# Altium PCB PDMC-P00-V00.PcbDoc
Units mil, origin at the board's own origin, x right, y up, seen from the top; angles counter-clockwise.
Board outline 1811.02 x 1102.36 mil, 2 copper layers (Top Layer, Bottom Layer), stack 61.8 mil thick; 77 components, 67 nets, 276 pads, 98 vias.
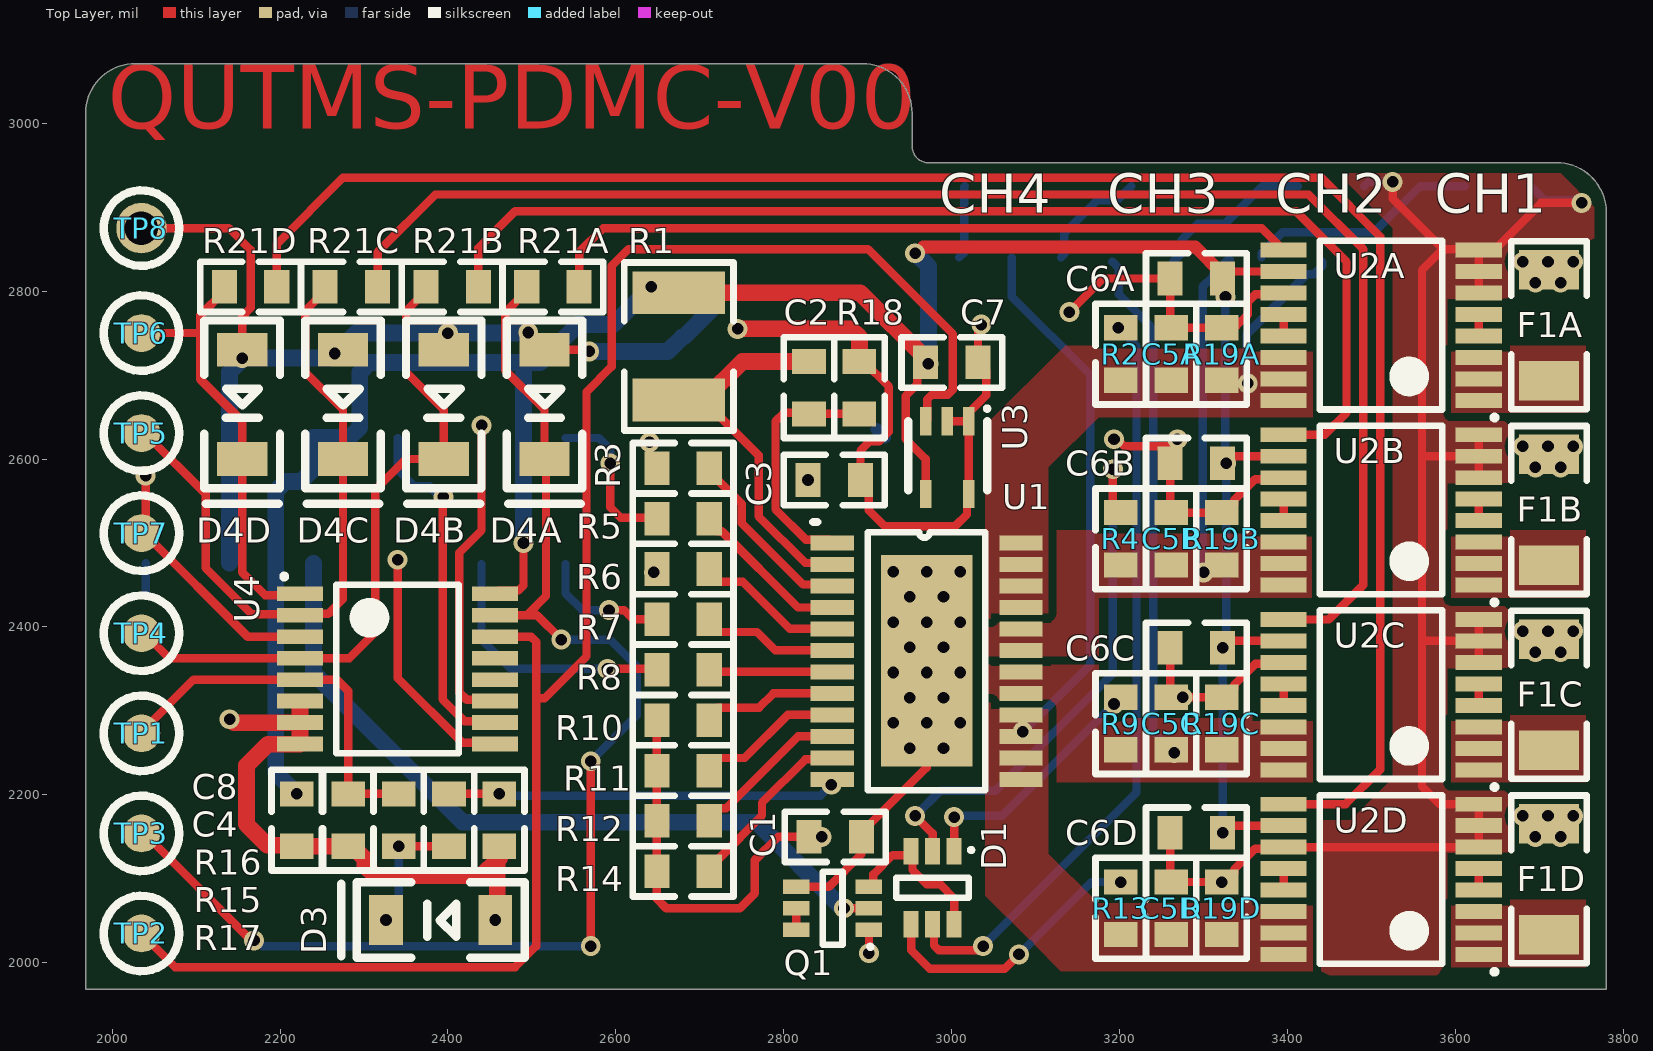
[diagram p0: Top Layer view]
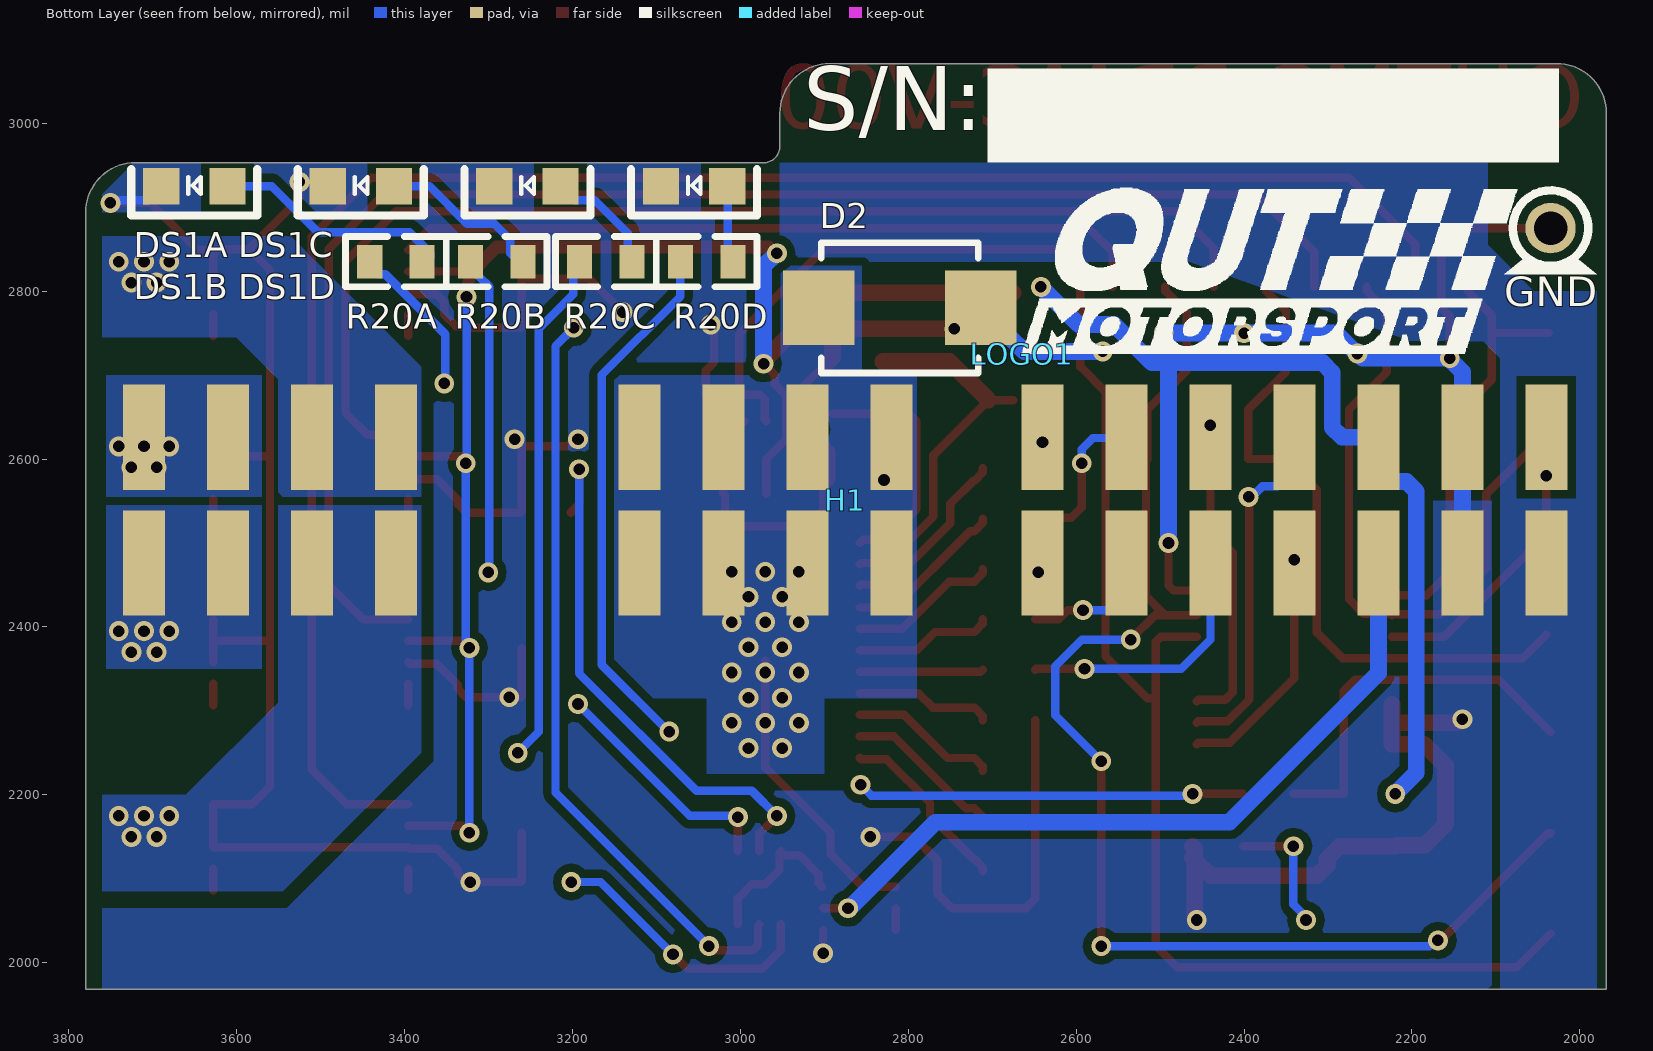
[diagram p1: Bottom Layer view, seen from below]

## Layer stack, top to bottom
Top Solder: solder mask 0.4, Solder Resist, Dk 3.5
Top Layer: signal copper 1.4
Dielectric 1: core 59, Core-043, Dk 4.3
Bottom Layer: signal copper 1.4
Bottom Solder: solder mask 0.4, Solder Resist, Dk 3.5

## Board outline
1968.5,1968.5 1968.5,3011.81 cw(c2027.56,3011.81) 2027.56,3070.87 2893.7,3070.87 cw(c2893.7,3011.81) 2952.76,3011.81 2952.76,2972.44 ccw(c2972.44,2972.44) 2972.44,2952.76 3720.47,2952.76 cw(c3720.47,2893.7) 3779.53,2893.7 3779.53,1968.5

## Design rules (kind name [scope] priority, off if disabled: settings)
Clearance [All] p1: gap=10 ignorepadtopadclearanceinfootprint=FALSE except(0: Arc-Hole Track-Hole SMDPad-Hole THPad-Hole Via-Hole Fill-Hole Poly-Hole Region-Hole Text-Hole; 6: SMDPad-SMDPad)
PolygonConnect [All] p1: connectstyle=Direct reliefconductorwidth=10 reliefentries=4 polygonreliefangle="90 Angle" airgapwidth=10
RoutingVias [All] p1: holewidth=13.78 width=23.62 viastyle="Through Hole" minholewidth=13.78 minwidth=23.62 maxholewidth=13.78 maxwidth=23.62
SilkToSilkClearance [All] p1: silktosilkclearance=0
SilkToSolderMaskClearance [IsPad] p1: minsilkscreentomaskgap=5 clearancetoexposedcopper=TRUE
SolderMaskExpansion [All] p1: expansion=4.02 istentingtop=FALSE
UnRoutedNet [All] p1: checkbadconnections=TRUE
Width [All] p1: maxlimit=60 minlimit=10 preferedwidth=20 minimp=50.000000 maximp=50.000000 favimp=50.000000
27 further rules are at their usual default settings.

## Classes and differential pairs
channel class PDMC-S03-V00-ChannelOutput: PDMC-S03-V00-ChannelOutput1 PDMC-S03-V00-ChannelOutput2 PDMC-S03-V00-ChannelOutput3 PDMC-S03-V00-ChannelOutput4
net class "CURRENT SENSE[1..4]": "CURRENT SENSE1" "CURRENT SENSE2" "CURRENT SENSE3" "CURRENT SENSE4"
component class PDMC-S06-V00-Connector: H1
component class PDMC-S05-V00-Multiplexer: C8 TP1 TP2 TP3 TP4 TP5 TP6 TP7 TP8 U4
component class PDMC-S04-V00-TempSensor: C7 U3
component class PDMC-S03-V00-ChannelOutput4: C5D C6D D4D DS1D F1D R19D R20D R21D U2D
component class PDMC-S03-V00-ChannelOutput3: C5C C6C D4C DS1C F1C R19C R20C R21C U2C
component class PDMC-S03-V00-ChannelOutput2: C5B C6B D4B DS1B F1B R19B R20B R21B U2B
component class PDMC-S03-V00-ChannelOutput1: C5A C6A D4A DS1A F1A R19A R20A R21A U2A
component class PDMC-S02-V00-SPOC: C1 C2 C3 C4 D1 D2 D3 Q1 R1 R2 R3 R4 R5 R6 R7 R8 R9 R10 R11 R12 R13 R14 R15 R16 R17 R18 U1
component class PDMC-S01-V00-PowerDistributionModuleCard: LOGO1
net class "SPOC CH[1..4]": "SPOC CH1" "SPOC CH2" "SPOC CH3" "SPOC CH4"
net class "OUT CH[1..4]": "OUT CH1" "OUT CH2" "OUT CH3" "OUT CH4"

## Components (designator, comment, footprint, x,y, rotation, side; value= is the part's Value field where it differs from the comment)
C1 "100nF" Cap_Ceramic_0603 2861.24,2150 r0 top
C2 "470nF" Cap_Ceramic_0603 2830,2685 r90 top
C3 "100nF" Cap_Ceramic_0603 2860,2575 r180 top
C4 "1nF" Cap_Ceramic_0603 2281.24,2170 r90 top
C5A "10nF" Cap_Ceramic_0603 3261.24,2725 r270 top (schematic designator C5)
C5B "10nF" Cap_Ceramic_0603 3261.24,2505 r270 top (schematic designator C5)
C5C "10nF" Cap_Ceramic_0603 3261.24,2285 r270 top (schematic designator C5)
C5D "10nF" Cap_Ceramic_0603 3261.24,2065 r270 top (schematic designator C5)
C6A "100nF" Cap_Ceramic_0603 3291.24,2815 r0 top (schematic designator C6)
C6B "100nF" Cap_Ceramic_0603 3291.24,2595 r0 top (schematic designator C6)
C6C "100nF" Cap_Ceramic_0603 3291.24,2375 r0 top (schematic designator C6)
C6D "100nF" Cap_Ceramic_0603 3291.24,2155 r0 top (schematic designator C6)
C7 "100nF" Cap_Ceramic_0603 3000,2715 r180 top
C8 "100nF" Cap_Ceramic_0603 2220,2170 r90 top
D1 "BAW56S" TSSOP6 2977.1,2089.39 r270 top
D2 "SMBJ15CA" DO-214AA 2810,2780 r0 bottom
D3 "BZT52B3V3" SOD123 2391.24,2051 r180 top
D4A "BZT52B3V3" SOD123 2515,2665 r270 top (schematic designator D4)
D4B "BZT52B3V3" SOD123 2395,2665 r270 top (schematic designator D4)
D4C "BZT52B3V3" SOD123 2275,2665 r270 top (schematic designator D4)
D4D "BZT52B3V3" SOD123 2155,2665 r270 top (schematic designator D4)
DS1A "LTST-S270TBKT" LTST-S270TBKT 3650,2925 r180 bottom (schematic designator DS1)
DS1B "LTST-S270TBKT" LTST-S270TBKT 3451.67,2925 r180 bottom (schematic designator DS1)
DS1C "LTST-S270TBKT" LTST-S270TBKT 3253.33,2925 r180 bottom (schematic designator DS1)
DS1D "LTST-S270TBKT" LTST-S270TBKT 3055,2925 r180 bottom (schematic designator DS1)
F1A "C1F 8A" FUSE_1206 3711.24,2759.37 r90 top (schematic designator F1)
F1B "C1F 8A" FUSE_1206 3711.24,2539.37 r90 top (schematic designator F1)
F1C "C1F 8A" FUSE_1206 3711.24,2319.37 r90 top (schematic designator F1)
F1D "C1F 8A" FUSE_1206 3711.24,2099.37 r90 top (schematic designator F1)
H1 "TSM-104, TSM-107" "TSM-104, TSM-107" 3710,2625.98 r180 bottom locked
LOGO1 "15mm Wide QUTMS Logo" "QUTMS LOGO 15MM" 2665,2725 r180 bottom
Q1 "PUMD3" TSSOP6 2858.05,2065 r180 top
R1 "470R" Res_ThinFilm_1210 2675,2733.99 r90 top
R2 "1k5" Res_ThinFilm_0603 3201.24,2725 r90 top
R3 "1k2" Res_ThinFilm_0603 2680,2588.99 r0 top
R4 "1k5" Res_ThinFilm_0603 3201.24,2505 r90 top
R5 "1k2" Res_ThinFilm_0603 2680,2528.99 r0 top
R6 "1k2" Res_ThinFilm_0603 2680,2468.99 r0 top
R7 "1k2" Res_ThinFilm_0603 2680,2408.99 r0 top
R8 "4k7" Res_ThinFilm_0603 2680,2348.99 r0 top
R9 "1k5" Res_ThinFilm_0603 3201.24,2285 r90 top
R10 "10k" Res_ThinFilm_0603 2680,2288.99 r0 top
R11 "10k" Res_ThinFilm_0603 2680,2228.99 r0 top
R12 "10k" Res_ThinFilm_0603 2680,2168.99 r0 top
R13 "1k5" Res_ThinFilm_0603 3201.24,2065 r90 top
R14 "10k" Res_ThinFilm_0603 2680,2108.99 r0 top
R15 "4k7" Res_ThinFilm_0603 2401.24,2170 r90 top
R16 "1k" Res_ThinFilm_0603 2341.24,2170 r270 top
R17 "1k2" Res_ThinFilm_0603 2461.24,2170 r90 top
R18 "47R" Res_ThinFilm_0603 2890,2685 r270 top
R19A "47k" Res_ThinFilm_0603 3321.24,2725 r270 top (schematic designator R19)
R19B "47k" Res_ThinFilm_0603 3321.24,2505 r270 top (schematic designator R19)
R19C "47k" Res_ThinFilm_0603 3321.24,2285 r270 top (schematic designator R19)
R19D "47k" Res_ThinFilm_0603 3321.24,2065 r270 top (schematic designator R19)
R20A "2k2" Res_ThinFilm_0603 3410,2835 r0 bottom (schematic designator R20)
R20B "2k2" Res_ThinFilm_0603 3290,2835 r0 bottom (schematic designator R20)
R20C "2k2" Res_ThinFilm_0603 3160,2835 r0 bottom (schematic designator R20)
R20D "2k2" Res_ThinFilm_0603 3040,2835 r0 bottom (schematic designator R20)
R21A "10k" Res_ThinFilm_0603 2525,2805 r0 top (schematic designator R21)
R21B "10k" Res_ThinFilm_0603 2405,2805 r0 top (schematic designator R21)
R21C "10k" Res_ThinFilm_0603 2285,2805 r0 top (schematic designator R21)
R21D "10k" Res_ThinFilm_0603 2165,2805 r0 top (schematic designator R21)
TP1 "TestPoint_SMD" TestPointSMD 2035,2273.33 r90 top
TP2 "TestPoint_SMD" TestPointSMD 2035,2035 r90 top
TP3 "TestPoint_SMD" TestPointSMD 2035,2154.17 r90 top
TP4 "TestPoint_SMD" TestPointSMD 2035,2392.5 r90 top
TP5 "TestPoint_SMD" TestPointSMD 2035,2630.83 r90 top
TP6 "TestPoint_SMD" TestPointSMD 2035,2750 r90 top
TP7 "TestPoint_SMD" TestPointSMD 2035,2511.67 r90 top
TP8 "TestPoint_Hoop_White" TestPointHoop_WHITE 2035,2875 r90 top
U1 "BTS71220-4ESA" PG-TSDO-24-32 2970,2360 r0 top locked
U2A "INA250" TSSOP-16N 3511.24,2759.37 r180 top (schematic designator U2)
U2B "INA250" TSSOP-16N 3511.24,2539.37 r180 top (schematic designator U2)
U2C "INA250" TSSOP-16N 3511.24,2319.37 r180 top (schematic designator U2)
U2D "INA250" TSSOP-16N 3511.24,2099.37 r180 top (schematic designator U2)
U3 "TMP235" SC70 3000,2600 r270 top
U4 "CD74HC4051PWR" TSSOP-16N 2340,2350 r0 top

## Footprints (in the part's own frame and the unit in brackets; to place one, negate y for a bottom-side part, rotate by r counter-clockwise, add the part's x,y. Pads: shape width x height; smd on the part's side, far side on the other; paste and mask are expansions set on the pad)
Cap_Ceramic_0603 [mil]
  rect 30x40 smd: 1(-31.24,0) 2(31.24,0)
  silkscreen extent -60,-30 60,30, body extent -31,-16 31,16, height 33
DO-214AA [mm]
  rect 2.16x2.26 smd paste+0 mask+0: 1(-2.45,0) 2(2.45,0)
  silkscreen extent -2.37,-1.97 2.37,1.97, body extent -2.7,-1.81 2.7,1.81, height 2.61
FUSE_1206 [mil]
  rect 47x71 smd: 1(-66.08,0) 2(66.08,0)
  silkscreen extent -100,-45 100,45, body extent -63,-31 63,31, height 24
LTST-S270TBKT [mm]
  rect 1.1x1.1 smd: A(1,0) K(-1,0)
  silkscreen extent -1.91,-0.89 1.91,0.51, body extent -1.07,-0.25 1.08,0.75, height 0.6
PG-TSDO-24-32 [mm]
  rect 1.31x0.45 smd: 1(-2.855,3.556) 2(-2.855,2.906) 3(-2.855,2.256) 4(-2.855,1.606) 5(-2.855,0.956) 6(-2.855,0.306) 7(-2.855,-0.344) 8(-2.855,-0.994) 9(-2.855,-1.644) 10(-2.855,-2.294) 11(-2.855,-2.944) 12(-2.855,-3.594) 13(2.855,-3.594) 14(2.855,-2.944) 15(2.855,-2.294) 16(2.855,-1.644) 17(2.855,-0.994) 18(2.855,-0.344) 19(2.855,0.306) 20(2.855,0.956) 21(2.855,1.606) 22(2.855,2.256) 23(2.855,2.906) 24(2.855,3.556)
  rect 2.77x6.4 smd: EP(0,0)
  silkscreen extent -3.43,-3.92 1.78,4.19, body extent -3,-4.32 3,4.33, height 1.01
"QUTMS LOGO 15MM" [mil]
  silkscreen extent 0,0 590,198
Res_ThinFilm_0603 [mil]
  rect 30x40 smd: 1(-31.24,0) 2(31.24,0)
  silkscreen extent -60,-30 60,30, body extent -31,-16 32,16, height 18
Res_ThinFilm_1210 [mm]
  rect 1.3x2.8 smd: 1(-1.625,0) 2(1.625,0)
  silkscreen extent -2.54,-1.65 2.54,1.65, body extent -1.6,-1.25 1.6,1.25, height 0.6
SC70 [mm] "SC70, 5-leads"
  rect 0.85x0.35 smd: 1(-1.143,0.508) 2(-1.143,-0.142) 3(-1.143,-0.792) 4(1.057,-0.792) 5(1.057,0.508)
  silkscreen extent -1.59,-1.32 0.94,1.13, body extent -1.14,-1.13 0.96,0.87, height 0.9
SOD123 [mil]
  rect 40x60 smd: A(-65,0) K(65,0)
  silkscreen extent -100,-45 118,45, body extent -74,-33 74,33, height 47
TestPointHoop_WHITE [mil]
  round 60 hole 40: 1(0,0)
  silkscreen extent -45,-45 45,45, body extent -39,-63 39,63, height 319
TestPointSMD [mil]
  round 45 smd: 1(0,0)
  silkscreen extent -45,-45 45,45
"TSM-104, TSM-107" [mm]
  rect 1.27x3.18 smd: A1(0,0) A2(2.54,0) A3(5.08,0) A4(7.62,0) B1(0,-3.81) B2(2.54,-3.81) B3(5.08,-3.81) B4(7.62,-3.81) C1(14.986,0) C2(17.526,0) C3(20.066,0) C4(22.606,0) D1(14.986,-3.81) D2(17.526,-3.81) D3(20.066,-3.81) D4(22.606,-3.81) E1(27.178,0) E2(29.718,0) E3(32.258,0) E4(34.798,0) E5(37.338,0) E6(39.878,0) E7(42.418,0) F1(27.178,-3.81) F2(29.718,-3.81) F3(32.258,-3.81) F4(34.798,-3.81) F5(37.338,-3.81) F6(39.878,-3.81) F7(42.418,-3.81)
  body extent -1.27,-15.11 43.69,1.14, height 6.07
TSSOP6 [mm] "TSOP, 6-Leads, Body 2.00x1.25mm, Pitch 0.65mm, IPC Medium Density"
  rect 0.8x0.45 smd: 1(-1.1,0.65) 2(-1.1,0) 3(-1.1,-0.65) 4(1.1,-0.65) 5(1.1,0) 6(1.1,0.65)
  silkscreen extent -1.2,-1.1 0.3,1.23, body extent -1.05,-1.05 1.05,1.1, height 0.93
TSSOP-16N [mm] "TSOP, 16-Leads, Body 5.00x4.40mm, Pitch 0.65mm, IPC Medium Density"
  rect 1.4x0.45 smd: 1(-2.95,2.275) 2(-2.95,1.625) 3(-2.95,0.975) 4(-2.95,0.325) 5(-2.95,-0.325) 6(-2.95,-0.975) 7(-2.95,-1.625) 8(-2.95,-2.275) 9(2.95,-2.275) 10(2.95,-1.625) 11(2.95,-0.975) 12(2.95,-0.325) 13(2.95,0.325) 14(2.95,0.975) 15(2.95,1.625) 16(2.95,2.275)
  silkscreen extent -3.5,-2.55 1.85,2.87, body extent -3.2,-2.55 3.2,2.55, height 1.2

## Part data
C1 C3 C6A C6B C6C C6D C7 C8: library part "100nF 50V 5% X7R 0603", "Capacitor, Ceramic, SMD, 100nF, 50V, 5%, X7R, 0603"
C2: library part "470nF 50V 5% X7R 0603", "Capacitor, Ceramic, SMD, 470nF, 50V, 5%, X7R, 0603"
C4: library part "1nF 50V 5% X7R 0603", "Capacitor, Ceramic, SMD, 1nF, 25V, 5%, X7R, 0603"
C5A C5B C5C C5D: library part "10nF 25V 5% X7R 0603", "Capacitor, Ceramic, SMD, 10nF, 25V, 5%, X7R, 0603"
D1: "Diode Array 2 Pair Common Anode Standard 90V 250mA (DC) Surface Mount 6-TSSOP, SC-88, SOT-363", ComponentLink1Description=Digikey, ComponentLink1URL=https://www.digikey.com.au/product-detail/en/nexperia-usa-inc/BAW56S-115/1727-4833-1-ND/2531320, ComponentLink2Description=Datasheet, ComponentLink2URL=https://assets.nexperia.com/documents/data-sheet/BAV756S_BAW56_SER.pdf
D2: "Diode, SMD, TVS, 15V, 24.4V, 24.6A Ipp, DO-214AA", ComponentLink1Description=Datasheet, ComponentLink1URL=https://www.littelfuse.com/~/media/electronics/datasheets/tvs_diodes/littelfuse_tvs_diode_smbj_datasheet.pdf.pdf, ComponentLink2Description=Digikey, ComponentLink2URL=https://www.digikey.com.au/product-detail/en/littelfuse-inc/SMBJ15CA/SMBJ15CALFCT-ND/285983
D3 D4A D4B D4C D4D: "Diode, SMD, Zener, 3.3V, 2%, 410mW, SOD-123", ComponentLink1Description=Datasheet, ComponentLink1URL=https://www.vishay.com/docs/85760/bzt52.pdf, ComponentLink2Description=Digikey, ComponentLink2URL=https://www.digikey.com/product-detail/en/vishay-semiconductor-diodes-division/BZT52B3V3-E3-08/112-BZT52B3V3-E3-08CT-ND/8564806
DS1A DS1B DS1C DS1D: "Blue 465~475nm 0603 Light Emitting Diodes (LED) RoHS"
F1A F1B F1C F1D: library part "C1F 8", "8A 125V AC 63V DC Fuse Board Mount (Cartridge Style Excluded) Surface Mount 1206 (3216 Metric)", ComponentLink1Description=Datasheet, ComponentLink1URL=https://belfuse.com/resources/datasheets/circuitprotection/ds-cp-c1f-series.pdf, ComponentLink2Description=Digikey, ComponentLink2URL=https://www.digikey.com.au/product-detail/en/bel-fuse-inc/C1F-8/507-1889-1-ND/4968171
H1: "CONN HEADER SMD R/A 8POS and 14POS 2.54MM", ComponentLink1Description=Digikey, ComponentLink1URL=https://www.digikey.com.au/product-detail/en/samtec-inc/TSM-104-01-L-DH/SAM10277-ND/6679014, ComponentLink2Description=Digikey, ComponentLink2URL=https://www.digikey.com.au/product-detail/en/samtec-inc/TSM-107-01-L-DH/SAM15902-ND/7638593, ComponentLink3Description=Datasheet, ComponentLink3URL=http://suddendocs.samtec.com/catalog_english/tsm.pdf
LOGO1: library part "QUTMS Logo 15mm"
Q1: "Pre-Biased Bipolar Transistor (BJT) 1 NPN, 1 PNP - Pre-Biased (Dual) 50V 100mA 300mW Surface Mount 6-TSSOP", ComponentLink1Description=Datasheet, ComponentLink1URL=https://assets.nexperia.com/documents/data-sheet/PEMD3_PIMD3_PUMD3.pdf, ComponentLink2Description=Digikey, ComponentLink2URL=https://www.digikey.com.au/product-detail/en/nexperia-usa-inc/PUMD3-165/1727-1984-1-ND/5221957
R1: library part "470R 5% 1210", "Resistor, SMD, 470R, 0.25W, 5%, 1210"
R2 R4 R9 R13: library part "1k5 5% 0603", "Resistor, SMD, 1k5, 0.1W, 5%, 0603"
R3 R5 R6 R7 R17: library part "1k2 5% 0603", "Resistor, SMD, 1k2, 0.1W, 5%, 0603"
R8 R15: library part "4k7 5% 0603", "Resistor, SMD, 4k7, 0.1W, 5%, 0603"
R10 R11 R12 R14 R21A R21B R21C R21D: library part "10k 5% 0603", "Resistor, SMD, 10k, 0.1W, 5%, 0603"
R16: library part "1k 5% 0603", "Resistor, SMD, 1k, 0.1W, 5%, 0603"
R18: library part "47R 5% 0603", "Resistor, SMD, 47R, 0.1W, 5%, 0603"
R19A R19B R19C R19D: library part "47k 5% 0603", "Resistor, SMD, 47k, 0.1W, 5%, 0603"
R20A R20B R20C R20D: library part "2k2 5% 0603", "Resistor, SMD, 2k2, 0.1W, 5%, 0603"
U1: "The BTS71220-4ESA is a SPI Power Controller, providing protection functions and diagnosis. The device is integrated in SMART7 technology.", ComponentLink1Description=Datasheet, ComponentLink1URL=https://www.infineon.com/dgdl/Infineon-BTS71220-4ESA-DS-v01_00-EN.pdf?fileId=5546d462636cc8fb0163feaaf85408d1, ComponentLink2Description=Digikey, ComponentLink2URL=https://www.digikey.com.au/product-detail/en/infineon-technologies/BTS712204ESAXUMA1/BTS712204ESAXUMA1CT-ND/9678741
U2A U2B U2C U2D: "INA250 36-V, Low- or High-Side, Bidirectional, Zero-Drift Current-Shunt Monitor with Precision Integrated Shunt Resistor", ComponentLink1Description=Datasheet, ComponentLink1URL=https://www.ti.com/lit/ds/symlink/ina250.pdf?HQS=TI-null-null-digikeymode-df-pf-null-wwe&ts=1595428770724, ComponentLink2Description="Digikey - A4", ComponentLink2URL=https://www.digikey.com.au/product-detail/en/texas-instruments/INA250A4PWR/296-43804-1-ND/5870052
U3: "TMP235, Low-Power, High-Accuracy Analog Output Temperature Sensor", ComponentLink1Description=Datasheet, ComponentLink1URL=https://www.ti.com/lit/ds/symlink/tmp235.pdf?HQS=TI-null-null-digikeymode-df-pf-null-wwe&ts=1595645947985, ComponentLink2Description=Digikey, ComponentLink2URL=https://www.digikey.com.au/product-detail/en/texas-instruments/TMP235A4DCKR/296-50016-1-ND/9462854
U4: "IC MUX/DEMUX 8X1 16TSSOP", ComponentLink1Description=Datasheet, ComponentLink1URL=https://www.ti.com/lit/ds/symlink/cd74hc4051.pdf?HQS=TI-null-null-digikeymode-df-pf-null-wwe&ts=1595658940184, ComponentLink2Description=Digikey, ComponentLink2URL=https://www.digikey.com/product-detail/en/texas-instruments/CD74HC4051PWR/296-13031-1-ND/480146

## Via types
v1: diameter 23.62, hole 13.78, Top Layer to Bottom Layer, tented both sides, 98 vias

## Nets (pads, with @x,y where several pads share a name; then routed paths per layer and width w, separated by ;. In a path a pad name is that pad's centre, name@x,y a point inside that pad or via, vN(x,y) a via of type N, cw(c..) or ccw(c..) an arc to the next point about the centre after c; other vN are vias at no path point)
3V3: C6A.2 C6B.2 C6C.2 C6D.2 C7.2 C8.2 H1.E5 R1.2 U2A.10 U2B.10 U2C.10 U2D.10 U3.4 U4.16 | length 3272.3
  Top Layer w10: U4.16 2460,2443.43 2484.14,2443.43 2490,2449.28 v1(2490,2500) ; U3.4 2968.82,2600.16 2945,2623.98 2945,2675 2958.78,2688.78 2958.78,2700 v1(2972.14,2713.37) C7.2@2972.14,2716.62 ; v1(3322.47,2155) 3330.82,2163.35 U2D.10 ; v1(3322.47,2375) 3330.82,2383.35 U2C.10 ; v1(3325.96,2793.05) 3325.96,2811.51 C6A.2 3330.82,2823.35 U2A.10 ; C6B.2@3330.82,2603.35 U2B.10
  Top Layer w15: v1(2956.36,2845.01) 2958.69,2845.01 2966.18,2852.5 3289.97,2852.5 3322.47,2820 C6A.2
  Top Layer w20: R1.2 2890.78,2797.98 C7.2@2972.14,2716.62
  Bottom Layer w10: v1@2217.39,2203.84 v1(2220,2201.24) ; v1(3322.47,2155) v1(3322.47,2375) 3326.81,2379.34 v1(3326.81,2595) ; v1@3325.08,2597.61 3325.57,2598.1 3325.57,2792.65 v1(3325.96,2793.05)
  Bottom Layer w20: v1@2217.39,2203.84 2195,2226.24 2195,2561.67 2206.72,2573.39 2225,2573.39 2240,2588.39 H1.E5 2283.28,2625.98 2295,2637.7 2295,2703.28 2306.72,2715 2490,2715 ; v1(2490,2500) 2490,2715 ; v1(2641.92,2805) 2596.94,2760.01 2555.01,2760.01 2510,2715 2490,2715 ; v1(2956.36,2845.01) 2956.74,2845.01 2972.14,2829.61 v1(2972.14,2713.37)
AGND: H1.F7 | length 37.6
  Bottom Layer w10: H1.F7@2040,2438.39 H1.F7
"ANALOG OUT": H1.E7 TP7.1 U4.3 | length 304.2
  Top Layer w10: v1(2040,2580) 2040,2510 2161.61,2388.39 U4.3
CS: H1.F2 R7.1 | length 156.6
  Top Layer w10: v1(2591.81,2420) 2609.77,2420 2620.78,2408.99 R7.1
  Bottom Layer w10: H1.F2@2540,2475 2540,2440 2560,2420 v1(2591.81,2420)
"CS OUTA": R21A.2 U2A.9 | length 902.8
  Top Layer w10: R21A.2 2556.24,2846.24 2585,2875 3369.03,2875 U2A.9
"CS OUTB": R21B.2 U2B.9 | length 1388.7
  Top Layer w10: R21B.2 2436.24,2851.24 2480,2895 3410,2895 3470,2835 3470,2655 3443.94,2628.94 U2B.9
"CS OUTC": R21C.2 U2C.9 | length 1782.3
  Top Layer w10: R21C.2 2316.24,2846.24 2385,2915 3425,2915 3490,2850 3490,2450 3448.94,2408.94 U2C.9
"CS OUTD": R21D.2 U2D.9 | length 2193.5
  Top Layer w10: R21D.2 2196.24,2856.24 2275,2935 3440,2935 3510,2865 3510,2230 3468.94,2188.94 U2D.9
"CS R": R7.2 U1.6 | length 164.6
  Top Layer w10: R7.2 2711.24,2403.99 2721.24,2393.99 2768.05,2393.99 2790,2372.05 U1.6
"CURRENT SENSE1": D4A.K R21A.1 TP3.1 U4.15 | length 1571.6
  Top Layer w10: TP3.1 2038.41,2154.17 2165.76,2026.81 v1(2169.17,2026.81) ; U4.15 2493.98,2413.98 ; R21A.1 2493.76,2800 2468.19,2774.43 2468.19,2705.6 2515,2658.79 D4A.K 2516.81,2598.19 2516.81,2436.81 2493.98,2413.98 ; v1(2535,2385) 2506.02,2413.98 2493.98,2413.98 ; v1(2570,2020) v1(2570,2240)
  Bottom Layer w10: v1(2169.17,2026.81) 2172.85,2026.81 2179.66,2020 v1(2570,2020) ; v1(2535,2385) 2592.92,2385 2625,2352.92 2625,2295 v1(2570,2240)
"CURRENT SENSE2": D4B.K R21B.1 TP4.1 U4.4 | length 797.9
  Top Layer w10: TP4.1@2040,2390.83 2068.04,2362.8 U4.4 2282.8,2362.8 2313.19,2393.19 2313.19,2563.19 2350,2600 D4B.K 2395,2658.79 2350,2703.79 2350,2776.24 2373.76,2800 R21B.1
"CURRENT SENSE3": D4C.K R21C.1 TP5.1 U4.2 | length 784.5
  Top Layer w10: TP5.1@2040,2630 2111.35,2558.65 2111.35,2470.36 2166.72,2415 2222.83,2415 U4.2 2225.59,2415.71 2257.63,2415.71 2275,2433.08 D4C.K 2275,2610 2275,2658.79 2230,2703.79 2230,2776.24 2253.76,2800 R21C.1
"CURRENT SENSE4": D4D.K R21D.1 TP6.1 U4.1 | length 521.3
  Top Layer w10: TP6.1@2037.13,2750 2105,2750 ; R21D.1 2133.76,2800 2105,2771.24 2105,2750 ; U4.1 2222.13,2437.84 2182.16,2437.84 2155,2465 D4D.K 2155,2645 2105,2695 2105,2750
GND: C1.1 C3.1 C4.1 C5A.1 C5B.1 C5C.1 C5D.1 C6A.1 C6B.1 C6C.1 C6D.1 C7.1 C8.1 D2.1 D3.A D4A.A D4B.A D4C.A D4D.A DS1A.K DS1B.K DS1C.K DS1D.K H1.E6 H1.F6 Q1.1 R10.1 R11.1 R12.1 R14.1 R17.1 R18.1 R19A.1 R19B.1 R19C.1 R19D.1 TP8.1 U2A.6 U2A.7 U2A.8 U2A.11 U2B.6 U2B.7 U2B.8 U2B.11 U2C.6 U2C.7 U2C.8 U2C.11 U2D.6 U2D.7 U2D.8 U2D.11 U3.1 U3.2 U3.5 U4.6 U4.7 U4.8 | length 5887.6
  Top Layer w10: TP8.1 2139.14,2875 2165,2849.14 2165,2780.02 2155,2770.02 D4D.A ; C8.1@2218.76,2140 C8.1 ; D4A.A 2566.39,2730 v1(2568.19,2728.2) ; R10.1 R11.1 R12.1 R14.1 2648.76,2076.24 2660,2065 2747.55,2065 2765.37,2082.82 2765.37,2122.18 2793.19,2150 C1.1 v1(2845,2150) ; R18.1@2895,2716.24 2925,2686.24 2925,2632.55 2913.72,2621.28 2902.51,2621.28 2891.24,2610 C3.1 2901.24,2565 2901.24,2538.76 2920,2520 3004.14,2520 3018.11,2533.97 3018.11,2556.5 U3.5 U3.1 ; v1(2901.35,2011.35) Q1.1 ; U3.2 U3.1 ; v1(3035,2760) 3031.24,2756.24 C7.1 3041.24,2705 3041.24,2676.08 3020,2654.84 U3.1 ; v1(3140,2775) 3180,2815 C6A.1 3260,2757.47 C5A.1 R19A.1 3323.19,2758.19 3338.63,2758.19 3352.54,2772.09 3352.54,2787.24 3361.32,2796.02 3393.36,2796.02 U2A.11 ; v1(3193.19,2623.62) 3196.88,2623.62 3205.5,2615 3260,2615 ; C6D.1 3260,2097.47 C5D.1 v1(3321.24,2096.24) 3326.24,2096.24 3336.24,2106.24 3336.24,2110.94 3361.32,2136.02 3393.36,2136.02 U2D.11 U2D.6 U2D.7 U2D.8 3581.06,2188.94 3560,2210 3560,2385 ; C6C.1 3260,2317.47 C5C.1 v1(3275,2316.24) R19C.1 3326.24,2316.24 3336.24,2326.24 3336.24,2330.94 3361.32,2356.02 3393.36,2356.02 U2C.11 ; v1(3268.62,2623.62) 3260,2615 ; U2B.11 3393.36,2576.02 3361.32,2576.02 3336.24,2550.94 3336.24,2546.24 3326.24,2536.24 R19B.1 C5B.1 3260,2537.47 C6B.1 3260,2615 ; v1(3525,2930) 3525,2910 3585,2850 ; U2C.6 U2C.7 ; U2C.8 U2C.7 ; U2B.6 U2B.7 ; U2B.8 U2B.7 ; U2A.6 U2A.7 U2A.8 ; v1(3750,2905) 3702.14,2905 3646.08,2848.94 U2A.8 ; 3560,2385 3560,2605 ; 3560,2385 3561.65,2383.35 U2C.7 ; 3560,2605 3560,2825 3585,2850 ; 3560,2605 3561.65,2603.35 U2B.7 ; 3585,2850 3626.32,2850 U2A.8
  Top Layer w20: v1(2140,2290) 2140.98,2290 2144.96,2286.02 U4.7 ; C8.1@2218.76,2140 2185,2140 2160,2165 2160,2235 2185.43,2260.43 U4.8 U4.7 ; C8.1 C4.1 2286.24,2138.76 2301.24,2123.76 2301.24,2115.48 2312.95,2103.76 2440,2103.76 2458.74,2122.5 ; U4.6@2223.65,2307.93 2223.65,2298.65 2223.86,2298.86 U4.7 ; v1(2456.24,2051) 2458.74,2053.5 2458.74,2122.5 ; R17.1@2461.24,2125 2458.74,2122.5 ; R17.1 2458.74,2136.26 2458.74,2122.5 ; v1(2745,2755) 2880,2755 2890,2745 2890,2721.24 R18.1@2895,2716.24
  Bottom Layer w10: v1(2568.19,2728.2) v1@2569.99,2730 ; DS1B.K 3496.04,2930 v1(3525,2930) ; DS1A.K 3706.02,2908.35 3742.97,2908.35 3746.31,2905 v1(3750,2905)
  Bottom Layer w20: H1.F6 H1.E6 2140,2703.58 2155,2718.58 v1(2155,2720) 2155.46,2720.46 2258.85,2720.46 2264.05,2725.66 v1(2265.03,2725.66) ; v1@2265,2727.33 2265.98,2726.35 2266.7,2726.35 2290.35,2750 v1(2400,2750) 2495,2750 v1(2495.62,2750.62) ; v1(2568.19,2728.2) 2661.74,2728.2 2679.06,2745.51 2681.02,2745.51 2713.54,2778.03 D2.1
IN0: R10.2 U1.8 | length 162.5
  Top Layer w10: R10.2 2711.24,2293.99 2721.24,2303.99 2770.59,2303.99 2787.46,2320.87 U1.8
IN1: R11.2 U1.9 | length 176.7
  Top Layer w10: R11.2 2711.24,2233.99 2721.24,2243.99 2753.38,2243.99 2804.67,2295.28 U1.9
IN2: R12.2 U1.10 | length 191
  Top Layer w10: R12.2 2711.24,2173.99 2721.24,2183.99 2731.12,2183.99 2816.81,2269.68 U1.10
IN3: R14.2 U1.11 | length 214.2
  Top Layer w10: R14.2 2711.24,2113.99 2721.24,2123.99 2722.45,2123.99 2774.02,2175.57 2774.02,2190.79 2825.6,2242.36 2855.87,2242.36 U1.11
IN-A: F1A.1 U2A.1 U2A.2 U2A.3
IN-B: F1B.1 U2B.1 U2B.2 U2B.3
IN-C: F1C.1 U2C.1 U2C.2 U2C.3
IN-D: F1D.1 U2D.1 U2D.2 U2D.3
IS: R15.2 R17.2 U1.12 | length 461.5
  Top Layer w10: R15.2 v1(2461.24,2201.24)
  Bottom Layer w10: v1(2461.24,2201.24) 2463.27,2199.2 2843.73,2199.2 v1(2856.61,2212.07)
"IS R": D3.K R15.1 R16.2 | length 154
  Top Layer w10: v1(2341.24,2138.76) R15.1
  Bottom Layer w10: v1(2326.24,2051) 2326.24,2054.69 2341.24,2069.69 v1(2341.24,2138.76)
"LED RA": DS1A.A R20A.1 | length 280
  Bottom Layer w10: R20A.1@3368.76,2840 3368.76,2845 3393.76,2870 3502.92,2870 3557.92,2925 DS1A.A
"LED RB": DS1B.A R20B.1 | length 195.2
  Bottom Layer w10: R20B.1@3263.76,2835 3273.76,2845 3273.76,2861 3292.76,2880 3325,2880 3370,2925 DS1B.A
"LED RC": DS1C.A R20C.1 | length 133.8
  Bottom Layer w10: R20C.1@3130,2840 3134.14,2844.14 3134.14,2869.14 3173.35,2908.35 3197.31,2908.35 DS1C.A
"LED RD": DS1D.A R20D.1 | length 87.8
  Bottom Layer w10: R20D.1@3008.76,2840 3015,2846.24 3015,2924.37 DS1D.A
LHI: H1.F3 R8.1 | length 313.7
  Top Layer w10: v1(2590,2350) 2647.76,2350 R8.1
  Bottom Layer w10: H1.F3@2440,2475 2440,2385 2475,2350 v1(2590,2350)
"LHI R": R8.2 U1.7 | length 147.4
  Top Layer w10: R8.2 2713.77,2346.46 U1.7
MISO: H1.E1 R3.1 | length 34.6
  Top Layer w10: v1(2640,2620) 2640,2597.76 R3.1
"MISO R": R3.2 U1.3 | length 220.8
  Top Layer w10: R3.2 2711.24,2583.99 2721.24,2573.99 2722.45,2573.99 2750,2546.44 2750,2523.43 2822.88,2450.55 2855.87,2450.55 U1.3
MOSI: H1.E2 R5.1 | length 189
  Top Layer w10: v1(2593.19,2595) 2593.19,2542.67 2605.86,2530 2647.76,2530 R5.1
  Bottom Layer w10: H1.E2@2540,2625 2580,2625 2593.19,2611.81 v1(2593.19,2595)
"MOSI R": R5.2 U1.4 | length 193.1
  Top Layer w10: R5.2 2711.24,2523.99 2721.24,2513.99 2726.05,2513.99 2816.81,2423.23 U1.4
NetD1_1: D1.1 R9.2 | length 279.5
  Top Layer w10: D1.1 v1(3002.69,2173.54)
  Bottom Layer w10: v1@3009.81,2175 3060,2175 3193.19,2308.19 v1(3193.19,2308.27)
NetD1_2: D1.2 R4.2 | length 655.5
  Top Layer w10: v1(2956.24,2175) 2977.1,2154.13 D1.2 ; v1(3191.81,2587.78) 3191.81,2546.24 R4.2@3201.81,2536.24
  Bottom Layer w10: v1(2956.24,2175) 2986.24,2205 3052,2205 3191.81,2344.81 v1(3191.81,2587.78)
NetD1_3: D1.3 D1.6 Q1.3 | length 186.8
  Top Layer w10: Q1.3@2902.78,2090.59 2906.64,2094.45 2906.64,2105.4 2929.54,2128.31 D1.3@2950.65,2128.31 ; D1.3 2953.24,2130.97 2953.24,2110.74 2970.2,2093.79 2985.74,2093.79 3002.69,2076.83 D1.6
NetD1_4: D1.4 R13.2 | length 337.7
  Top Layer w10: D1.4 2951.51,2015.34 2973.66,1993.19 3063.19,1993.19 v1(3080,2010) ; v1(3201.24,2096.24) R13.2@3205,2092.47
  Bottom Layer w10: v1(3080,2010) 3166.24,2096.24 v1(3201.24,2096.24)
NetD1_5: D1.5 R2.2 | length 912.9
  Top Layer w10: D1.5 2978.83,2044.35 2978.83,2020.86 2984.69,2015 3032.33,2015 v1(3037.33,2020) ; v1(3198.19,2756.24) R2.2
  Bottom Layer w10: v1(3037.33,2020) 3220,2202.67 3220,2734.43 v1(3198.19,2756.24)
NetQ1_5: Q1.5 Q1.6 | length 25.6
  Top Layer w10: Q1.6 Q1.5
NetU2A_4: U2A.4 U2A.5 | length 25.6
  Top Layer w10: U2A.4 U2A.5
NetU2A_12: U2A.12 U2A.13 | length 25.6
  Top Layer w10: U2A.13 U2A.12
NetU2B_4: U2B.4 U2B.5 | length 25.6
  Top Layer w10: U2B.4 U2B.5
NetU2B_12: U2B.12 U2B.13 | length 25.6
  Top Layer w10: U2B.13 U2B.12
NetU2C_4: U2C.4 U2C.5 | length 25.6
  Top Layer w10: U2C.4 U2C.5
NetU2C_12: U2C.12 U2C.13 | length 25.6
  Top Layer w10: U2C.13 U2C.12
NetU2D_4: U2D.4 U2D.5 | length 25.6
  Top Layer w10: U2D.4 U2D.5
NetU2D_12: U2D.12 U2D.13 | length 25.6
  Top Layer w10: U2D.13 U2D.12
"OPEN LOAD": H1.F5 Q1.2 | length 908.3
  Top Layer w10: v1(2871.61,2065) Q1.2
  Bottom Layer w20: H1.F5 2240,2345 2417.5,2167.5 2767.51,2167.5 2868.2,2066.81 2868.82,2066.81 2870.63,2065 v1(2871.61,2065)
"OUT CH1": F1A.2 H1.A3 H1.A4
  other v1: 3695,2810 3725,2810 3680,2835 3710,2835 3740,2835
"OUT CH2": F1B.2 H1.A1 H1.A2
  other v1: 3695,2590 3725,2590 3680,2615 3710,2615 3740,2615
"OUT CH3": F1C.2 H1.B1 H1.B2
  other v1: 3695,2370 3725,2370 3680,2395 3710,2395 3740,2395
"OUT CH4": F1D.2 H1.B3 H1.B4
  other v1: 3695,2150 3725,2150 3680,2175 3710,2175 3740,2175
S0: H1.E3 U4.11 | length 375.7
  Top Layer w10: v1(2440,2640) 2440,2515 2413.58,2488.58 2413.58,2322.13 2422.37,2313.35 2454.41,2313.35 U4.11
S1: H1.E4 U4.10 | length 421.1
  Top Layer w10: v1(2394.54,2554.83) 2393.58,2553.87 2393.58,2313.85 2419.68,2287.76 2454.41,2287.76 U4.10
  Bottom Layer w10: H1.E4@2340,2625 2340,2587.4 2360,2567.4 2378.29,2567.4 2390.86,2554.83 v1(2394.54,2554.83)
S2: H1.F4 U4.9 | length 294.6
  Top Layer w10: v1@2340,2485 2340,2339.15 2416.98,2262.17 2454.41,2262.17 U4.9
  other v1: 2340,2480
SCK: H1.F1 R6.1 | length 5.6
  Top Layer w10: v1(2645,2465) 2648.76,2468.76 R6.1
"SCK R": R6.2 U1.5 | length 178.8
  Top Layer w10: R6.2 2711.24,2463.99 2721.24,2453.99 2750.85,2453.99 2807.2,2397.64 U1.5
"SPOC CH1": C5A.2 R2.1 R19A.2 R20A.2 U1.21 U1.22 U1.23 U1.24 U2A.14 U2A.15 U2A.16 | length 187.8
  Bottom Layer w10: v1(3352.38,2690) 3351.24,2691.15 3351.24,2748.58 3422.65,2820 3431.24,2820 3441.24,2830 R20A.2
"SPOC CH2": C5B.2 R4.1 R19B.2 R20B.2 U1.19 U1.20 U2B.14 U2B.15 U2B.16 | length 388
  Bottom Layer w10: v1(3300,2465) 3298.76,2466.24 3298.76,2805.11 3311.24,2817.59 3311.24,2820 3328.82,2837.59 R20B.2@3331.24,2837.59
"SPOC CH3": C5C.2 R9.1 R19C.2 R20C.2 U1.17 U1.18 U2C.14 U2C.15 U2C.16 | length 615.6
  Bottom Layer w10: R20C.2 3198.72,2827.51 3198.72,2796.28 3240,2755 3240,2275 v1(3265,2250)
"SPOC CH4": C5D.2 R13.1 R19D.2 R20D.2 U1.13 U1.14 U1.15 U1.16 U2D.14 U2D.15 U2D.16 | length 637.2
  Bottom Layer w10: R20D.2@3071.24,2840 3071.24,2793.76 3165,2700 3165,2355 3085.46,2275.46 v1(3084.54,2275.46)
"SPOC GND": C2.1 R18.2 U1.1 | length 294.5
  Top Layer w10: C2.1 R18.2 ; C2.1@2831.24,2655 2800,2655 2790,2645 2790,2540 2826.14,2503.86 2853.74,2503.86 U1.1
"SPOC SENSE": C4.2 R16.1 TP1.1 U4.5 | length 460.1
  Top Layer w10: TP1.1@2035,2275 2097.2,2337.2 U4.5 2267.8,2337.2 2281.24,2323.76 C4.2 R16.1
"SPOC VDD": C2.2 R1.1 U1.2 | length 450.9
  Top Layer w10: R1.1 2704.53,2670 2770,2604.53 2770,2531.72 2825.57,2476.14 2855.87,2476.14 U1.2
  Top Layer w20: R1.1@2704.53,2670 2750.76,2716.24 C2.2
"TEMP SENSE": TP2.1 U3.3 U4.14 | length 2053.5
  Top Layer w10: TP2.1 2075,1995 2480,1995 2505,2020 2505,2315 ; U4.14 2499.14,2388.39 2505,2382.53 2505,2315 ; U3.3 2970.71,2646.89 2970.71,2670.87 2976.57,2676.73 2995.38,2676.73 3001.24,2682.59 3001.24,2748.76 2900,2850 2615,2850 2595,2830 2595,2710 2565,2680 2565,2365 2515,2315 2505,2315
VS: C1.2 C3.2 D2.2 H1.C1 H1.C2 H1.C3 H1.C4 H1.D1 H1.D2 H1.D3 H1.D4 Q1.4 U1.EP | length 369.7
  Top Layer w10: Q1.4 2853.64,2090.59 2892.47,2129.43 C1.2 2892.47,2155 2970,2232.53 U1.EP
  Bottom Layer w15: H1.C3@2910.69,2635.3 H1.C3
  other v1: 2950.09,2255.76 2990.09,2255.76 2930.09,2285.76 2970.09,2285.76 3010.09,2285.76 2950.09,2315.76 2990.09,2315.76 2930.09,2345.76 2970.09,2345.76 3010.09,2345.76 2950.09,2375.76 2990.09,2375.76 2930.09,2405.76 2970.09,2405.76 3010.09,2405.76 2950.09,2435.76 2990.09,2435.76 2930.09,2465.76 2970.09,2465.76 3010.09,2465.76 2828.76,2575
pads on no net: U4.12 U4.13

## Polygon pours and split planes (outlines as drawn)
GND on Top Layer "GND_L01_P059" (solid, remove dead copper, pour order 59): 3725,2940 3460,2940 3525,2875 3525,2220 3475,2170 3435,2170 3435,1985 3765,1985 3765,2900
"SPOC CH3" on Top Layer "SPOC_CH3_L01_P049" (solid, pour order 49): 3430,2295 3175,2295 3175,2355 3040,2355 3040,2310 3120,2310 3120,2215 3170,2215 3430,2215
"SPOC CH2" on Top Layer "SPOC_CH2_L01_P050" (solid, pour order 50): 3428.76,2435 3175,2435 3175,2361.24 3038.76,2361.24 3038.76,2406.24 3118.76,2406.24 3118.76,2515 3428.76,2515
"SPOC CH1" on Top Layer "SPOC_CH1_L01_P048" (solid, pour order 48): 3430,2650 3430,2735 3135,2735 3040,2640 3040,2410 3115,2410 3115,2590 3175,2650
"SPOC CH4" on Top Layer "SPOC_CH4_L01_P047" (solid, pour order 47): 3430,2075 3430,1990 3130,1990 3040,2080 3040,2310 3115,2310 3115,2130 3170,2075
no net on Top Layer "NONET_L01_P040" (solid, pour order 40): 3050,2360
IN-D on Top Layer "IN-D_L01_P033" (solid, pour order 33): 3595,2075 3755,2075 3755,1995 3595,1995
IN-C on Top Layer "IN-C_L01_P032" (solid, pour order 32): 3595,2295 3755,2295 3755,2215 3595,2215
IN-B on Top Layer "IN-B_L01_P030" (solid, pour order 30): 3595,2515 3755,2515 3755,2435 3595,2435
IN-A on Top Layer "IN-A_L01_P029" (solid, pour order 29): 3595,2735 3755,2735 3755,2655 3595,2655
no net on Top Layer "NONET_L01_P006" (solid, pour order 6): 4880,4450
no net on Top Layer "NONET_L01_P016" (solid, pour order 16): 5790,3037.5
no net on Top Layer "NONET_L01_P020" (solid, pour order 20): 6085,3300
GND on Bottom Layer "GND_L02_P058" (solid, remove dead copper, pour order 58): 2780,2550 2105,2550 2105,1968.5 2780,1968.5
AGND on Bottom Layer "AGND_L02_P056" (solid, remove dead copper, pour order 56): 2095,1968.5 2095,2720 2115,2740 2200,2740 2465,2835 2952.76,2835 2952.76,2952.76 2110,2952.76 2110,2855 2055,2800 1980,2800 1980,1968.5
GND on Bottom Layer "GND_L02_P054" (solid, remove dead copper, pour order 54): 3760,2893.7 3760,2915 3722.24,2952.76 2970,2952.76 2970,2715 3165,2715 3165,2279.17 3090.83,2205 2770,2205 2770,1968.5 3760,1968.5 3760,2064.93 3540.07,2064.93 3365,2240 3365,2717.36 3545.83,2893.7
VS on Bottom Layer "VS_L02_P053" (solid, pour order 53): 2960,2690 2855,2690 2855,2830 2960,2830
"OUT CH4" on Bottom Layer "OUT_CH4_L02_P043" (solid, pour order 43): 3380,2545 3550,2545 3550,2310 3660,2200 3760,2200 3760,2085 3545,2085 3380,2250
"OUT CH1" on Bottom Layer "OUT_CH1_L02_P046" (solid, pour order 46): 3550,2555 3380,2555 3380,2710 3535,2865 3760,2865 3760,2745 3600,2745 3550,2695
VS on Bottom Layer "VS_L02_P051" (solid, pour order 51): 2790,2700 2790,2315 2900,2315 2900,2225 3040,2225 3040,2315 3150,2315 3150,2700
"OUT CH2" on Bottom Layer "OUT_CH2_L02_P045" (solid, pour order 45): 3570,2555 3570,2700 3755,2700 3755,2555
"OUT CH3" on Bottom Layer "OUT_CH3_L02_P044" (solid, pour order 44): 3570,2545 3755,2545 3755,2350 3570,2350

## Other copper
Top Layer:
  text "QUTMS-PDMC-V00" at 1995,2968.28 h130

## Silkscreen, mask and mechanical layers (free items; w line width, h text height)
Top Overlay:
  text "CH4" at 2985,2877.5 h80
  text "CH3" at 3185,2877.5 h80
  text "CH2" at 3385,2877.5 h80
  text "CH1" at 3575,2877.5 h80
Bottom Overlay:
  circle w10: c2035,2875 r45
  region: 2090,2820 2065,2840 2060,2835 2010,2835 2005,2840 1980.01,2820
  region: 1975,2820
  region: 2025,3065 2025,2953.13 2705,2953.13 2705,3065
  text "S/N:" at 2924.94,2966.61 h130
  text "GND" at 2090,2770 h60
Top Solder:
  rectangle: 2958.13,2624.29 3030.97,2665.85
  text "QUTMS-PDMC-V00" at 1995,2968.28 h130
Mechanical 1:
  the board outline again, w10